# EAGLE board CT_schematic (EAGLE 7.6.0)

Size 100 x 80 mm. Coordinates in mm from the lower left corner, seen from the top.
Outline: 0,0 100,0 100,80 0,80 0,0
Copper layers (1*16): Top 0.035mm / dielectric 1.5mm / Bottom 0.035mm
Design rules "default": minimum track width 10mil, minimum drill 24mil, track to track 8mil, track to pad 8mil, pad to pad 8mil, via to via 8mil, smd to smd 8mil, copper to edge 40mil, drill to drill 8mil, minimum pad ring 10mil, minimum via ring 8mil, stop-mask expansion 4mil, vias tented up to drill 0mil, thermal gap 10mil

## Footprints (pad centres in the part's own frame; a part is rotated, then mirrored left to right if it is on the bottom)
C0603 = smd 0.8 x 0.8: 1 -0.762,0; 2 0.762,0
C0402 = smd 0.5 x 0.5: 1 -0.508,0; 2 0.508,0
C1210 = smd 1.2 x 2.5: 1 -1.524,0; 2 1.524,0
EXV-9H = smd 3.505 x 1.676: 1 -2.857,0; 2 2.857,0
L0603 = smd 0.8 x 0.8: 1 -0.762,0; 2 0.762,0
L1210 = smd 1.2 x 2.5: 1 -1.524,0; 2 1.524,0
PJ-037B_PACKAGE = drill 3.7 square: 1 12,0 | drill 3.2 square: 2 6,0
R0603 = smd 0.8 x 0.8: 1 -0.762,0; 2 0.762,0
WLCSP49 = smd 0.25 x 0.25: A1 -1.2,1.2; A2 -0.8,1.2; A3 -0.4,1.2; A4 0,1.2; A5 0.4,1.2; A6 0.8,1.2; A7 1.2,1.2; B1 -1.2,0.8; B2 -0.8,0.8; B3 -0.4,0.8; B4 0,0.8; B5 0.4,0.8; B6 0.8,0.8; B7 1.2,0.8; C1 -1.2,0.4; C2 -0.8,0.4; C3 -0.4,0.4; C4 0,0.4; C5 0.4,0.4; C6 0.8,0.4; C7 1.2,0.4; D1 -1.2,0; D2 -0.8,0; D3 -0.4,0; D4 0,0; D5 0.4,0; D6 0.8,0; D7 1.2,0; E1 -1.2,-0.4; E2 -0.8,-0.4; E3 -0.4,-0.4; E4 0,-0.4; E5 0.4,-0.4; E6 0.8,-0.4; E7 1.2,-0.4; F1 -1.2,-0.8; F2 -0.8,-0.8; F3 -0.4,-0.8; F4 0,-0.8; F5 0.4,-0.8; F6 0.8,-0.8; F7 1.2,-0.8; G1 -1.2,-1.2; G2 -0.8,-1.2; G3 -0.4,-1.2; G4 0,-1.2; G5 0.4,-1.2; G6 0.8,-1.2; G7 1.2,-1.2
SAMTEC_FTSH-105-01-L-DV-K = smd 0.762 x 2.794: 1 -2.54,-2.032; 2 -2.54,2.032; 3 -1.27,-2.032; 4 -1.27,2.032; 5 0,-2.032; 6 0,2.032; 7 1.27,-2.032; 8 1.27,2.032; 9 2.54,-2.032; 10 2.54,2.032
SSOP-16 = smd 1.981 x 0.356: 1 -2.464,2.223; 2 -2.464,1.587; 3 -2.464,0.953; 4 -2.464,0.318; 5 -2.464,-0.318; 6 -2.464,-0.953; 7 -2.464,-1.587; 8 -2.464,-2.223; 9 2.464,-2.223; 10 2.464,-1.587; 11 2.464,-0.953; 12 2.464,-0.318; 13 2.464,0.318; 14 2.464,0.953; 15 2.464,1.587; 16 2.464,2.223
HTSS-105-01-G-D = drill 1 pad 1.8 square: 1 0,0 | drill 1 pad 1.8: 2 0,2.54; 3 2.54,0; 4 2.54,2.54; 5 5.08,0; 6 5.08,2.54; 7 7.62,0; 8 7.62,2.54; 9 10.16,0; 10 10.16,2.54
TDFN-8/6MM = smd 0.3 x 0.75: 1 0,0; 2 0.5,0; 3 1,0; 4 1.5,0; 5 1.5,3; 6 1,3; 7 0.5,3; 8 0,3
TSSOP20-I = smd 0.4 x 1.35: 1 -2.925,-2.875; 2 -2.275,-2.875; 3 -1.625,-2.875; 4 -0.975,-2.875; 5 -0.325,-2.875; 6 0.325,-2.875; 7 0.975,-2.875; 8 1.625,-2.875; 9 2.275,-2.875; 10 2.925,-2.875; 11 2.925,2.875; 12 2.275,2.875; 13 1.625,2.875; 14 0.975,2.875; 15 0.325,2.875; 16 -0.325,2.875; 17 -0.975,2.875; 18 -1.625,2.875; 19 -2.275,2.875; 20 -2.925,2.875
182-009-MALE = drill 1.194 pad 1.524 octagon: 1 -5.537,10.923; 2 -2.769,10.923; 3 0,10.923; 4 2.769,10.923; 5 5.537,10.923; 6 -4.153,8.08; 7 -1.384,8.08; 8 1.384,8.08; 9 4.153,8.08 | hole 3.048: -12.446,9.501; 12.446,9.501
ASEK = smd 1.4 x 1: 1 -1.1,-0.8; 2 1.1,-0.8; 3 1.1,0.8; 4 -1.1,0.8
ASFL1 = smd 1.7 x 1.5: 1 -1.27,-1.1; 2 1.27,-1.1; 3 1.27,1.1; 4 -1.27,1.1
SOIC-8_EP = smd 1.6 x 0.533: 1 -2.921,1.905; 2 -2.921,0.635; 3 -2.921,-0.635; 4 -2.921,-1.905; 5 2.921,-1.905; 6 2.921,-0.635; 7 2.921,0.635; 8 2.921,1.905 | smd 2.54 x 3.302: EPAD 0,0 | drill 0.406 pad 0.406: P$1 -0.508,0.635; P$2 0.381,0.635; P$3 -0.508,-0.635; P$4 0.381,-0.635
SON-6 = smd 0.55 x 0.3: 1 -0.355,0.5 | smd 0.52 x 0.3: 2 -0.37,0; 3 -0.37,-0.5; 4 0.37,-0.5; 5 0.37,0; 6 0.37,0.5
SW_4-1437565-2 = smd 1.4 x 2.1: 1 -2.23,4.55; 2 -2.23,-4.55; 3 2.23,4.55; 4 2.23,-4.55
LGM67K-G1J2-24-Z = smd 0.8 x 1.4: A -2,0; C 0,0
NC7SZ125M5X = smd 1.3 x 0.7: 1 -1.3,0.95; 2 -1.3,0; 3 -1.3,-0.95; 4 1.3,-0.95; 5 1.3,0.95

## Placement (x,y rotation side)
C1  1e-06  [C0603]  -71.12,76.2 0 top  (outside the outline)
C2  1e-07  [C0603]  -74.93,76.2 0 top  (outside the outline)
C3  1e-07  [C0603]  -78.74,76.2 0 top  (outside the outline)
C4  1e-07  [C0603]  -15.24,81.28 0 top  (outside the outline)
C5  1e-07  [C0603]  -19.05,81.28 0 top  (outside the outline)
C6  1e-07  [C0603]  -22.86,81.28 0 top  (outside the outline)
C7  4.7e-06  [C0603]  -59.69,76.2 0 top  (outside the outline)
C8  2.2e-06  [C0603]  -63.5,76.2 0 top  (outside the outline)
C9  1e-08  [C0603]  -26.67,81.28 0 top  (outside the outline)
C10  1e-06  [C0603]  -30.48,81.28 0 top  (outside the outline)
C11  1e-07  [C0402]  -19.05,86.36 0 top  (outside the outline)
C12  1e-06  [C0603]  -34.29,81.28 0 top  (outside the outline)
C13  1e-06  [C0603]  -38.1,81.28 0 top  (outside the outline)
C14  2.2e-07  [C0603]  -67.31,76.2 0 top  (outside the outline)
C15  1e-06  [C0603]  -41.91,81.28 0 top  (outside the outline)
C16  1e-06  [C0603]  -45.72,81.28 0 top  (outside the outline)
C17  1e-08  [C0402]  -22.86,86.36 0 top  (outside the outline)
C18  1e-07  [C0402]  -26.67,86.36 0 top  (outside the outline)
C19  1e-07  [C0402]  -30.48,86.36 0 top  (outside the outline)
C20  1e-07  [C0402]  -34.29,86.36 0 top  (outside the outline)
C21  1e-07  [C0402]  -38.1,86.36 0 top  (outside the outline)
C22  1e-07  [C0402]  -41.91,86.36 0 top  (outside the outline)
C23  1e-07  [C0402]  -45.72,86.36 0 top  (outside the outline)
C24  1e-08  [C0402]  -49.53,86.36 0 top  (outside the outline)
C25  1e-08  [C0402]  -53.34,86.36 0 top  (outside the outline)
C26  1e-05  [C1210]  -63.5,62.23 0 top  (outside the outline)
C27  1e-05  [C1210]  -69.85,62.23 0 top  (outside the outline)
C28  1e-05  [C1210]  -76.2,62.23 0 top  (outside the outline)
C29  1e-05  [C1210]  -16.51,71.12 0 top  (outside the outline)
C30  1e-07  [C0402]  -57.15,86.36 0 top  (outside the outline)
C31  0.0001  [EXV-9H]  -69.85,53.34 0 top  (outside the outline)
C32  0.0001  [EXV-9H]  -17.78,63.5 0 top  (outside the outline)
C33  1e-08  [C0402]  -60.96,86.36 0 top  (outside the outline)
C34  1e-08  [C0402]  -64.77,86.36 0 top  (outside the outline)
F1  240.0  [L0603]  -49.53,81.28 0 top  (outside the outline)
I1  1e-05  [L1210]  -22.86,71.12 0 top  (outside the outline)
J1  PJ-037B  [PJ-037B_PACKAGE]  -57.15,29.21 0 top  (outside the outline)
R1  10000.0  [R0603]  -64.77,69.85 0 top  (outside the outline)
R2  1000.0  [R0603]  -53.34,81.28 0 top  (outside the outline)
R3  1600.5  [R0603]  -57.15,81.28 0 top  (outside the outline)
R4  4700.0  [R0603]  -60.96,81.28 0 top  (outside the outline)
R5  2200.0  [R0603]  -64.77,81.28 0 top  (outside the outline)
R6  2200.0  [R0603]  -68.58,81.28 0 top  (outside the outline)
R7  10000.0  [R0603]  -69.85,69.85 0 top  (outside the outline)
R8  10000.0  [R0603]  -74.93,69.85 0 top  (outside the outline)
R9  10000.0  [R0603]  -15.24,76.2 0 top  (outside the outline)
R10  10000.0  [R0603]  -20.32,76.2 0 top  (outside the outline)
R11  10000.0  [R0603]  -25.4,76.2 0 top  (outside the outline)
R12  10000.0  [R0603]  -30.48,76.2 0 top  (outside the outline)
R13  5.0  [R0603]  -72.39,81.28 0 top  (outside the outline)
R14  100000.0  [R0603]  -49.53,69.85 0 top  (outside the outline)
R15  10000.0  [R0603]  -35.56,76.2 0 top  (outside the outline)
R16  10000.0  [R0603]  -40.64,76.2 0 top  (outside the outline)
R17  10000.0  [R0603]  -45.72,76.2 0 top  (outside the outline)
R18  4031.5447154472  [R0603]  -44.45,69.85 0 top  (outside the outline)
R19  2200.0  [R0603]  -76.2,81.28 0 top  (outside the outline)
R20  10000.0  [R0603]  -50.8,76.2 0 top  (outside the outline)
R21  10000.0  [R0603]  -55.88,76.2 0 top  (outside the outline)
R22  9100.0  [R0603]  -15.24,86.36 0 top  (outside the outline)
R23  680000.0  [R0603]  -54.61,69.85 0 top  (outside the outline)
R24  120000.0  [R0603]  -59.69,69.85 0 top  (outside the outline)
U1  STM32F411CEY3  [WLCSP49]  -35.56,63.5 0 top  (outside the outline)
U2  FTSH-105-01-L-DV-K  [SAMTEC_FTSH-105-01-L-DV-K]  -35.56,30.48 0 top  (outside the outline)
U3  LTC2804CGN-1#PBF  [SSOP-16]  -44.45,43.18 0 top  (outside the outline)
U4  HTSS-105-01-G-D  [HTSS-105-01-G-D]  -63.5,41.91 0 top  (outside the outline)
U5  24AA64T-I/MNY  [TDFN-8/6MM]  -24.13,53.34 0 top  (outside the outline)
U6  SP3203ECY-L/TR  [TSSOP20-I]  -24.13,43.18 0 top  (outside the outline)
U7  182-009-113R531  [182-009-MALE]  -36.83,6.35 0 top  (outside the outline)
U8  ASEK-32.768KHz-ECST  [ASEK]  -60.96,53.34 0 top  (outside the outline)
U9  ASFL1-25MHZ-NCS  [ASFL1]  -40.64,53.34 0 top  (outside the outline)
U10  MIC5234YME  [SOIC-8_EP]  -43.18,62.23 0 top  (outside the outline)
U11  TPS3895ADRYR  [SON-6]  -67.31,85.09 0 top  (outside the outline)
U12  4-1437565-2  [SW_4-1437565-2]  -73.66,27.94 0 top  (outside the outline)
U13  Q65110A2395  [LGM67K-G1J2-24-Z]  -52.07,62.23 0 top  (outside the outline)
U14  nc7sz125m5x  [NC7SZ125M5X]  -27.94,69.85 0 top  (outside the outline)
U15  nc7sz125m5x  [NC7SZ125M5X]  -34.29,69.85 0 top  (outside the outline)

## Library data of the parts
C1-C34 F1 I1 J1 R1-R24 U1-U15 = circuit_tree

## Nets
CLK_U1_C7: U1.C7 U8.3
CLK_U1_D7: U1.D7 U9.3
GND: C1.2 C2.2 C3.2 C4.2 C5.2 C6.2 C7.2 C8.2 C9.2 C10.2 C11.2 C12.2 C13.2 C15.2 C16.2 C17.2 C18.2 C19.2 C22.2 C23.2 C24.2 C25.2 C26.2 C27.2 C28.2 C29.2 C30.2 C31.2 C32.2 C33.2 C34.2 J1.2 R2.2 R7.2 R12.2 R13.2 R17.2 R19.2 R22.2 R24.2 U1.A6 U1.B1 U1.D3 U1.E6 U2.3 U2.5 U3.8 U4.9 U5.4 U6.18 U7.5 U8.2 U9.2 U10.7 U10.EPAD U11.2 U13.C U14.2 U14.3 U15.1 U15.3
NET_U1_A5: R7.1 U1.A5
NET_U1_B5: R5.1 U1.B5 U5.6
NET_U1_B6: R8.1 U1.B6
NET_U1_C5: R6.1 U1.C5 U5.5
NET_U1_E7: R4.1 U1.E7 U15.4
NET_U1_F7: C9.1 C10.1 F1.1 U1.F7
NET_U1_G2: C8.1 U1.G2
NET_U1_G5: R3.1 U1.G5 U13.A
NET_U1_G6: R1.1 U1.G6 U12.3 U12.4
NET_U2_9: R13.1 U2.9
NET_U3_6: C12.1 U3.6
NET_U3_7: C14.1 I1.2 U3.7
NET_U3_9: C13.1 U3.9
NET_U3_10: C14.2 U3.10
NET_U3_11: R14.1 U3.11
NET_U4_3: U3.1 U4.3
NET_U4_4: U3.2 U4.4
NET_U4_5: U3.3 U4.5
NET_U4_6: U3.4 U4.6
NET_U5_1: R15.1 U5.1
NET_U5_2: R16.1 U5.2
NET_U5_3: R17.1 U5.3
NET_U6_1: C20.1 U6.1
NET_U6_2: C22.1 U6.2
NET_U6_3: C20.2 U6.3
NET_U6_4: C21.1 U6.4
NET_U6_5: C21.2 U6.5
NET_U6_6: C23.1 U6.6
NET_U6_20: U6.20
NET_U7_2: U6.14 U7.2
NET_U7_3: U6.17 U7.3
NET_U7_7: U6.13 U7.7
NET_U7_8: U6.16 U7.8
NET_U10_4: R18.2 R19.1 U10.4
NET_U11_1: R21.1 R22.1 U11.1
NET_U11_3: R23.2 R24.1 U11.3
NET_U11_4: R20.1 U11.4 U14.4 U15.2
NET_U12_1: R2.1 U12.1 U12.2
PROC_SYS_JTCK_SWCLK: R12.1 U1.A1 U2.4
PROC_SYS_JTDI: R10.1 U1.A2 U2.8
PROC_SYS_JTDO_SWO: U1.A3 U2.6
PROC_SYS_JTMS_SWDIO: R11.1 U1.B3 U2.2
PROC_USART1_CTS: U1.C1 U6.8
PROC_USART1_RTS: U1.C3 U6.10
PROC_USART1_RX: U1.C2 U6.11
PROC_USART1_TX: U1.C4 U6.7
PROC_USART2_CTS: U1.F6 U3.13
PROC_USART2_RTS: U1.G7 U3.15
PROC_USART2_RX: U1.E4 U3.16
PROC_USART2_TX: U1.E5 U3.14
RST_OUT_U2_JTAG_RST_B: R9.1 U2.10 U14.1
VCC_S1_6V7: C26.1 C27.1 C31.1 C32.1 J1.1 U10.5 U10.8
VCC_TIER1_3V3: C1.1 C2.1 C3.1 C4.1 C5.1 C6.1 C7.1 C11.1 C15.1 C16.1 C17.1 C18.1 C19.1 C24.1 C25.1 C28.1 C29.1 C30.1 C33.1 C34.1 F1.2 I1.1 R1.2 R3.2 R4.2 R5.2 R6.2 R8.2 R9.2 R10.2 R11.2 R14.2 R15.2 R16.2 R18.1 R20.2 R21.2 R23.1 U1.A7 U1.B2 U1.B7 U1.F2 U2.1 U3.5 U3.12 U5.7 U5.8 U6.12 U6.19 U8.4 U9.4 U10.1 U11.6 U14.5 U15.5

## Tracks (layer width: path | path; a pad name or v marks a point on that pad's centre or on a via)
CLK_U1_C7  (1 unrouted)
CLK_U1_D7  (1 unrouted)
GND  (60 unrouted)
NET_U1_A5  (1 unrouted)
NET_U1_B5  (2 unrouted)
NET_U1_B6  (1 unrouted)
NET_U1_C5  (2 unrouted)
NET_U1_E7  (2 unrouted)
NET_U1_F7  (3 unrouted)
NET_U1_G2  (1 unrouted)
NET_U1_G5  (2 unrouted)
NET_U1_G6  (3 unrouted)
NET_U2_9  (1 unrouted)
NET_U3_6  (1 unrouted)
NET_U3_7  (2 unrouted)
NET_U3_9  (1 unrouted)
NET_U3_10  (1 unrouted)
NET_U3_11  (1 unrouted)
NET_U4_3  (1 unrouted)
NET_U4_4  (1 unrouted)
NET_U4_5  (1 unrouted)
NET_U4_6  (1 unrouted)
NET_U5_1  (1 unrouted)
NET_U5_2  (1 unrouted)
NET_U5_3  (1 unrouted)
NET_U6_1  (1 unrouted)
NET_U6_2  (1 unrouted)
NET_U6_3  (1 unrouted)
NET_U6_4  (1 unrouted)
NET_U6_5  (1 unrouted)
NET_U6_6  (1 unrouted)
NET_U7_2  (1 unrouted)
NET_U7_3  (1 unrouted)
NET_U7_7  (1 unrouted)
NET_U7_8  (1 unrouted)
NET_U10_4  (2 unrouted)
NET_U11_1  (2 unrouted)
NET_U11_3  (2 unrouted)
NET_U11_4  (3 unrouted)
NET_U12_1  (2 unrouted)
PROC_SYS_JTCK_SWCLK  (2 unrouted)
PROC_SYS_JTDI  (2 unrouted)
PROC_SYS_JTDO_SWO  (1 unrouted)
PROC_SYS_JTMS_SWDIO  (2 unrouted)
PROC_USART1_CTS  (1 unrouted)
PROC_USART1_RTS  (1 unrouted)
PROC_USART1_RX  (1 unrouted)
PROC_USART1_TX  (1 unrouted)
PROC_USART2_CTS  (1 unrouted)
PROC_USART2_RTS  (1 unrouted)
PROC_USART2_RX  (1 unrouted)
PROC_USART2_TX  (1 unrouted)
RST_OUT_U2_JTAG_RST_B  (2 unrouted)
VCC_S1_6V7  (6 unrouted)
VCC_TIER1_3V3  (54 unrouted)